# EAGLE board breakout proto (EAGLE 9.0.0)
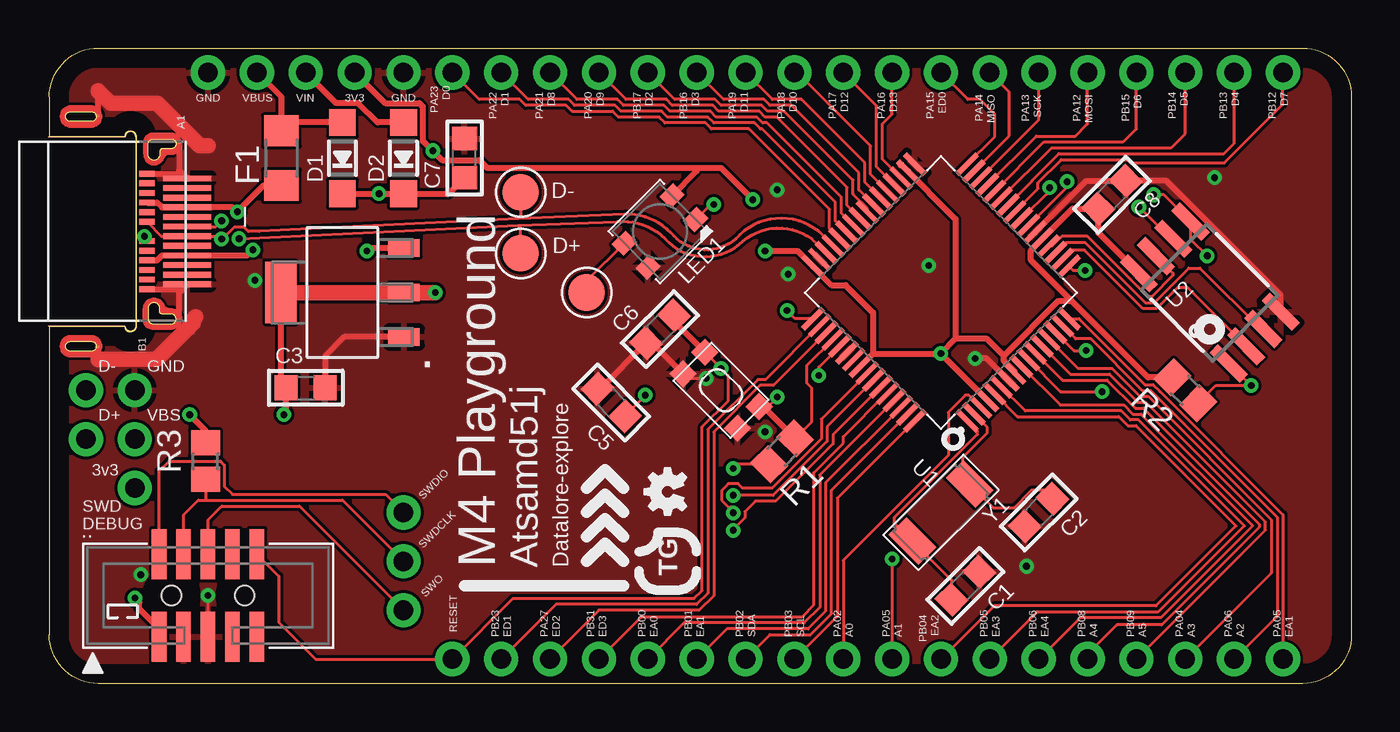
[diagram p0: board, top side]
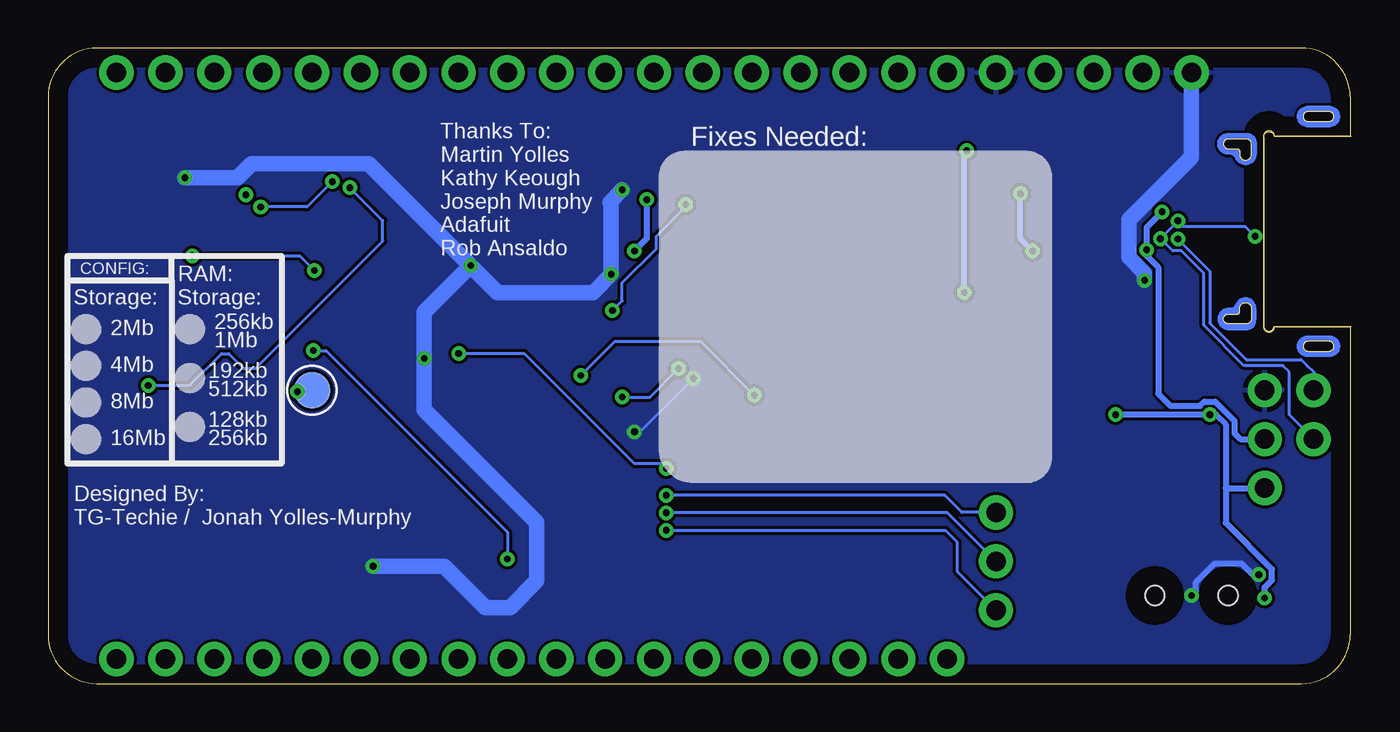
[diagram p1: board, bottom side, seen from below]

Size 67.69 x 33.02 mm. Coordinates in mm from the lower left corner, seen from the top.
Outline: 0,30.48 arc-90 2.54,33.02 65.15,33.02 arc-90 67.69,30.48 67.69,2.54 arc-90 65.15,0 2.54,0 arc-90 0,2.54 0,18.54 3.94,18.54 arc90 4.22,18.26 arc90 4.52,18.54 4.52,28.45 arc90 4.22,28.73 arc90 3.94,28.45 0,28.45 0,30.48
Copper layers (1*16): Top 0.035mm / dielectric 1.5mm / Bottom 0.035mm
Design rules "default": minimum track width 6mil, minimum drill 0.35mm, track to track 6mil, track to pad 6mil, pad to pad 6mil, via to via 6mil, smd to smd 6mil, copper to edge 40mil, drill to drill 6mil, minimum pad ring 10mil, minimum via ring 8mil, stop-mask expansion 4mil, vias tented up to drill 0mil, thermal gap 10mil

## Footprints (pad centres in the part's own frame; a part is rotated, then mirrored left to right if it is on the bottom)
SOT230P700X180-4N = smd 1.626 x 0.889: 1 -3.2,2.311; 2 -3.2,0; 3 -3.2,-2.311 | smd 1.626 x 3.175: 4 3.2,0
2X05_1.27MM_BOX_POSTS = smd 0.76 x 2.6: 1 -2.54,-2.15; 2 -2.54,2.15; 3 -1.27,-2.15; 4 -1.27,2.15; 5 0,-2.15; 6 0,2.15; 7 1.27,-2.15; 8 1.27,2.15; 9 2.54,-2.15; 10 2.54,2.15 | hole 1: -1.905,0; 1.905,0
TE_1-2295018-2_EXTEN = smd 0.3 x 2.5: A1 -2.75,5.53; A2 -2.25,5.53; A3 -1.75,5.53; A4 -1.25,5.53; A5 -0.75,5.53; A6 -0.25,5.53; A7 0.25,5.53; A8 0.75,5.53; A9 1.25,5.53; A10 1.75,5.53; A11 2.25,5.53; A12 2.75,5.53 | smd 0.3 x 0.8: B1 3,3.43; B2 2.5,3.43; B3 2,3.43; B4 1.5,3.43; B5 1,3.43; B6 0.5,3.43; B7 -0.5,3.43; B8 -1,3.43; B9 -1.5,3.43; B10 -2,3.43; B11 -2.5,3.43; B12 -3,3.43 | smd 0.1 x 0.1: S1 -4.6,5.1; S2 4.6,5.1; S3 6,0.9; S4 -6,0.9
MICROBUILDER__0805 = smd 1.2 x 1.3: 1 -1.016,0; 2 1.016,0
SOD-123 = smd 1.4 x 1.4: A 1.85,0; C -1.85,0
R1206 = smd 1.6 x 1.803: 1 -1.422,0; 2 1.422,0
1X2_HEDR = drill 1.016 pad 1.778: 1 -1.27,0; 2 1.27,0
1X4_HEDR = drill 1.016 pad 1.778: 1 -3.81,0; 2 -1.27,0; 3 1.27,0; 4 3.81,0
1X5_HEDR = drill 1.016 pad 1.778: 1 -5.08,0; 2 -2.54,0; 3 0,0; 4 2.54,0; 5 5.08,0
LED3535 = smd 1 x 0.85: 1 -1.75,0.875; 2 -1.75,-0.875; 3 1.75,-0.875; 4 1.75,0.875
R0805 = smd 1.3 x 1.5: 1 -0.95,0; 2 0.95,0
KMR2 = smd 1 x 1: 1 2,0.8; 2 2,-0.8; 3 -2,0.8; 4 -2,-0.8
1X1_POGO = smd 1.905 x 1.905: 1 0,0
QFP50P1200X1200X120-64N = smd 1.47 x 0.28: 1 -5.67,3.75; 2 -5.67,3.25; 3 -5.67,2.75; 4 -5.67,2.25; 5 -5.67,1.75; 6 -5.67,1.25; 7 -5.67,0.75; 8 -5.67,0.25; 9 -5.67,-0.25; 10 -5.67,-0.75; 11 -5.67,-1.25; 12 -5.67,-1.75; 13 -5.67,-2.25; 14 -5.67,-2.75; 15 -5.67,-3.25; 16 -5.67,-3.75; 33 5.67,-3.75; 34 5.67,-3.25; 35 5.67,-2.75; 36 5.67,-2.25; 37 5.67,-1.75; 38 5.67,-1.25; 39 5.67,-0.75; 40 5.67,-0.25; 41 5.67,0.25; 42 5.67,0.75; 43 5.67,1.25; 44 5.67,1.75; 45 5.67,2.25; 46 5.67,2.75; 47 5.67,3.25; 48 5.67,3.75 | smd 0.28 x 1.47: 17 -3.75,-5.67; 18 -3.25,-5.67; 19 -2.75,-5.67; 20 -2.25,-5.67; 21 -1.75,-5.67; 22 -1.25,-5.67; 23 -0.75,-5.67; 24 -0.25,-5.67; 25 0.25,-5.67; 26 0.75,-5.67; 27 1.25,-5.67; 28 1.75,-5.67; 29 2.25,-5.67; 30 2.75,-5.67; 31 3.25,-5.67; 32 3.75,-5.67; 49 3.75,5.67; 50 3.25,5.67; 51 2.75,5.67; 52 2.25,5.67; 53 1.75,5.67; 54 1.25,5.67; 55 0.75,5.67; 56 0.25,5.67; 57 -0.25,5.67; 58 -0.75,5.67; 59 -1.25,5.67; 60 -1.75,5.67; 61 -2.25,5.67; 62 -2.75,5.67; 63 -3.25,5.67; 64 -3.75,5.67
SOIC8_208MIL = smd 0.6 x 2.2: 1 -1.905,-3.315; 2 -0.635,-3.315; 3 0.635,-3.315; 4 1.905,-3.315; 5 1.905,3.315; 6 0.635,3.315; 7 -0.635,3.315; 8 -1.905,3.315
1X1_HEDR = drill 1.016 pad 1.778: 1 0,0
1X3_HEDR = drill 1.016 pad 1.778: 1 -2.54,0; 2 0,0; 3 2.54,0
MICROBUILDER_CRYSTAL_4.9X1.8 = smd 1.3 x 2.2: 1 -2.1,0; 2 2.1,0

## Placement (x,y rotation side)
.  VREG-1.5A-3.3V-ADP3339AKCZ-3.3-RL  [SOT230P700X180-4N]  15.24,20.32 180 top
..  [2X05_1.27MM_BOX_POSTS]  8.26,4.57 0 top
_  USB-C-CON-MIDBRD-SHORT-1-2295018-2EXTEN  [TE_1-2295018-2_EXTEN]  1.65,23.5 270 top
C1  22pf  [MICROBUILDER__0805]  47.62,5.08 225 top
C2  22pf  [MICROBUILDER__0805]  51.44,8.89 225 top
C3  1uf  [MICROBUILDER__0805]  13.34,15.37 0 top
C5  4.7uf  [MICROBUILDER__0805]  29.21,14.61 135 top
C6  .1uf  [MICROBUILDER__0805]  31.75,18.41 45 top
C7  1uf  [MICROBUILDER__0805]  21.59,27.3 90 top
C8  1uf  [MICROBUILDER__0805]  55.24,25.4 225 top
D1  [SOD-123]  15.24,27.3 90 top
D2  [SOD-123]  18.41,27.3 90 top
F1  [R1206]  12.06,27.3 90 top
FRAME1  FRAME-LEDGER  [CREATIVE_COMMONS]  -1.27,-8.89 0 top  (outside the outline)
HEDR1  1X2HEDR  [1X2_HEDR]  37.47,1.27 0 top
HEDR2  1X2HEDR  [1X2_HEDR]  47.62,1.27 0 top
HEDR3  1X4HEDR  [1X4_HEDR]  60.33,31.75 180 top
HEDR4  1X2HEDR  [1X2_HEDR]  32.38,31.75 180 top
HEDR5  1X2HEDR  [1X2_HEDR]  32.38,1.27 0 top
HEDR6  1X5HEDR  [1X5_HEDR]  13.34,31.75 0 top
HEDR7  1X4HEDR  [1X4_HEDR]  40.01,31.75 0 top
HEDR8  1X2HEDR  [1X2_HEDR]  18.41,7.62 270 top
HEDR9  1X4HEDR  [1X4_HEDR]  24.77,31.75 0 top
HEDR10  1X2HEDR  [1X2_HEDR]  4.45,13.97 90 top
HEDR11  1X2HEDR  [1X2_HEDR]  1.91,13.97 270 top
LED1  LED-NEO-WS2812B3535  [LED3535]  31.75,23.5 225 top
LOGO1  OSHW-LOGOMINI  [OSHW-LOGO-MINI]  32.13,9.97 90 top
R1  10k  [R0805]  38.1,12.06 225 top
R2  10k  [R0805]  59.05,15.24 135 top
R3  10k  [R0805]  8.13,11.56 90 top
SW1  SPST_TACT-KMR2  [KMR2]  34.92,15.24 315 top
TP1  TESTPOINT_1X1  [1X1_POGO]  27.94,20.32 0 top
U1  MCU-ATSAMD51J  [QFP50P1200X1200X120-64N]  46.35,20.32 135 top
U2  [SOIC8_208MIL]  60.33,20.32 45 top
U$1  1X1HEDR  [1X1_HEDR]  41.27,1.27 90 top
U$2  1X3HEDR  [1X3_HEDR]  53.98,1.27 0 top
U$3  1X1HEDR  [1X1_HEDR]  28.57,1.27 90 top
U$4  1X3HEDR  [1X3_HEDR]  51.44,31.75 0 top
U$5  1X1HEDR  [1X1_HEDR]  46.35,31.75 90 top
U$6  1X1HEDR  [1X1_HEDR]  26.04,1.27 90 top
U$7  1X1HEDR  [1X1_HEDR]  23.5,1.27 90 top
U$8  1X1POGO  [1X1_POGO]  53.98,15.24 270 bottom
U$9  1X1HEDR  [1X1_HEDR]  20.95,1.27 90 top
U$10  1X3HEDR  [1X3_HEDR]  61.59,1.27 180 top
U$11  1X1HEDR  [1X1_HEDR]  43.81,1.27 90 top
U$12  1X1HEDR  [1X1_HEDR]  18.41,3.81 0 top
U$13  1X1POGO  [1X1_POGO]  24.51,25.53 0 top
U$14  1X1POGO  [1X1_POGO]  24.51,22.35 0 top
U$15  [LOGO_TG_TEST_LARGE]  33.66,6.35 90 top
U$16  1X1HEDR  [1X1_HEDR]  4.45,10.16 0 top
Y1  32.768  [MICROBUILDER_CRYSTAL_4.9X1.8]  46.35,8.89 225 top

## Library data of the parts
. = 0TG-Lib v01.3; AVAILABILITY: Good; DESCRIPTION: IC REG LINEAR 3.3V 1.5A SOT223-3; MF: Analog Devices; MP: ADP3339AKCZ-3.3-RL; PACKAGE: SOT-223-3 Analog Devices; PRICE: 3.52 USD
.. _ C1-C3 C5-C8 D1 D2 HEDR1-HEDR11 LED1 TP1 U2 U$1-U$16 Y1 = 0TG-Lib v01.3
F1 SW1 = 00adafruit
FRAME1 LOGO1 = SparkFun-Aesthetics
R1-R3 = 0TG-Lib v01.3; SPICEPREFIX: R
U1 = 0TG-Lib v01.3; AVAILABILITY: Good; DESCRIPTION: 120MHZ 1024KB Flash 64 TQFP PKG inTray 85CTemp, 64 TQFP 10x10x1mm TRAY; MF: Microchip; MP: ATSAMD51J20A-AU; PACKAGE: TQFP-64 Microchip; PRICE: 4.66 USD

## Nets
3V3: ..2 ..4 ...1 C3.1 C8.2 HEDR6.4 LED1.2 R1.2 R2.2 R3.2 U1.4 U1.8 U1.21 U1.34 U1.48 U1.56 U2.8 U$16.1
A0: U1.3 U$1.1
A1: U1.14 U$11.1
A2: U1.15 U$10.2
A3: U1.13 U$10.3
A4: U1.11 U$2.2
A5: U1.12 U$2.3
D0: HEDR9.1 U1.44
D1: HEDR9.2 U1.43
D2: HEDR4.2 U1.40
D3: HEDR4.1 U1.39
D4: HEDR3.2 U1.26
D5: HEDR3.3 U1.27
D6: HEDR3.4 U1.28
D7: HEDR3.1 U1.25
D8: HEDR9.3 U1.42
D9: HEDR9.4 U1.41
D10: HEDR7.2 U1.37
D11: HEDR7.1 U1.38
D12: HEDR7.3 U1.36
D13: HEDR7.4 U1.35
D+: _.A6 _.B6 HEDR11.2 U1.46 U$14.1
D-: _.A7 _.B7 HEDR11.1 U1.45 U$13.1
EA0: HEDR5.1 U1.61
EA1: HEDR5.2 U1.62
EA2: HEDR2.1 U1.5
EA3: HEDR2.2 U1.6
EA4: U1.9 U$2.1
EA5: U1.16 U$10.1
ED0: U1.32 U$5.1
ED1: U1.50 U$7.1
ED2: U1.51 U$6.1
ED3: U1.60 U$3.1
FLASH_CS: R2.1 U1.24 U2.1
FLASH_IO0: U1.17 U2.5
FLASH_IO1: U1.18 U2.2
FLASH_IO2: U1.19 U2.3
FLASH_IO3: U1.20 U2.7
FLASH_SCK: U1.23 U2.6
GND: ..1 ...3 ...5 _.A1 _.A12 _.B1 _.B12 _.S1 _.S2 _.S3 _.S4 C1.1 C2.2 C3.2 C5.2 C6.1 C7.2 C8.1 HEDR6.1 HEDR6.5 HEDR10.2 LED1.4 SW1.2 SW1.4 U1.7 U1.22 U1.33 U1.47 U1.54 U2.4
MISO: U1.31 U$4.1
MOSI: U1.29 U$4.3
N$4: C5.1 U1.53
N$32: C1.2 U1.1 Y1.2
N$33: C2.1 U1.2 Y1.1
NEOPIX: LED1.1 U1.49
NEOPIX_DOUT: LED1.3 TP1.1
RESET: ...10 C6.2 R1.1 SW1.1 SW1.3 U1.52 U$9.1
SCK: U1.30 U$4.2
SCL: HEDR1.2 U1.64
SDA: HEDR1.1 U1.63
SWDCLK: ...4 HEDR8.2 R3.1 U1.57
SWDIO: ...2 HEDR8.1 U1.58
SWO: ...6 U1.59 U$12.1
USB_HOSTEN: U1.10 U$8.1
VBUS: D1.A F1.2 HEDR6.2
VBUS_RAW: _.A4 _.A9 _.B4 _.B9 F1.1 HEDR10.1
VIN: D2.A HEDR6.3
VSORS: ..3 C7.1 D1.C D2.C
VSW: U1.55

## Tracks (layer width: path | path; a pad name or v marks a point on that pad's centre or on a via)
3V3  (via drill 0.35)
  Top 0.152: R1.2 35.78,11.39 v35.56,11.18 | 52.47,19.89 53.02,20
  Top 0.305: U2.8 54.53,23.42 C8.2 53.19,24.68 U1.21 51.03,22.52 51.03,21.99 53.02,20 57.11,15.91 R2.2 | U1.8 50.19,16.21 49.62,16.78 49.62,17.03 | 49.62,17.03 52.47,19.89 53.14,19.89 54.04,18.99 | U1.56 42.83,17.14 | v46.35,17.14 U1.4 | 42.83,17.14 v46.35,17.14 | U1.34 44.31,26.96 44.23,26.96 44.27,26.92 44.32,26.92 47.11,24.14 47.11,17.91 | 42.83,17.14 42.83,19.28 41.4,20.7 40.67,20.7 U1.48 38.89,22.48 v37.21,22.48 | 49.62,17.03 48.74,17.91 47.11,17.91 | 47.11,17.91 v46.35,17.14 | HEDR6.4 17.46,30.16 19.24,30.16 19.42,29.98 19.42,28.2 v19.94,27.69 20.43,27.19 22.37,27.19 22.76,26.8 33.66,26.8 | v36.58,25.15 34.92,26.8 33.66,26.8 | LED1.2 33.66,26.64 33.66,26.8 | ..4 12.04,15.65 C3.1 12.32,14.1 v12.19,13.97 | v4.46,4.45 4.68,4.22 4.68,3.88 5.71,2.85 ...1 | 7.93,12.7 R3.2 8.13,13.14 v7.3,13.97
  Top 0.813: ..4 ..2 v20.07,20.32
  Bottom 0.152: v35.56,11.18 35.81,11.43 37.21,11.43 42.93,17.14 v46.35,17.14
  Bottom 0.305: v36.58,25.15 36.58,23.11 v37.21,22.48 | v20.07,20.32 20.07,27.56 v19.94,27.69 | v4.46,4.45 4.46,4.99 4.07,5.37 4.07,5.94 6.48,8.34 6.48,10.16 | v12.19,13.97 v7.3,13.97 6.99,13.97 6.48,13.46 6.48,10.16 | 6.48,10.16 U$16.1
A0
  Top 0.152: U1.3 47.8,14.99 47.62,14.99 46.74,14.1 46.74,11.86 41.27,6.4 U$1.1
A1  (via drill 0.35)
  Top 0.152: U1.14 53.26,17.3 v53.9,17.3 | v43.81,6.48 U$11.1
  Bottom 0.152: v53.9,17.3 53.24,17.3 44.96,9.02 43.81,7.87 v43.81,6.48
A2
  Top 0.152: U1.15 53.36,17.91 54.15,17.91 56.83,15.23 57.25,15.23 63.83,8.65 63.83,3.5 U$10.2
A3
  Top 0.152: U1.13 53.47,16.38 55.24,16.38 56.7,14.92 57.13,14.92 63.52,8.52 63.52,5.74 U$10.3
A4
  Top 0.152: U1.11 52.67,15.77 54.99,15.77 56.45,14.31 56.88,14.31 56.93,14.26 62.92,8.27 62.92,8.13 57.84,3.05 55.5,3.05 53.98,1.52 U$2.2
A5
  Top 0.152: U1.12 53.07,16.08 55.12,16.08 56.58,14.62 57,14.62 63.22,8.4 63.22,7.98 U$2.3
D0
  Top 0.152: U1.44 40.56,23.64 40.56,24.64 36.37,28.83 34.42,28.83 34.12,29.13 32.01,29.13 31.7,29.44 29.59,29.44 29.29,29.74 27.18,29.74 26.88,30.05 24.77,30.05 24.46,30.35 22.35,30.35 HEDR9.1
D1
  Top 0.152: U1.43 40.87,24.04 40.87,25.02 37.06,28.83 36.96,28.83 36.66,29.13 34.55,29.13 34.24,29.44 32.13,29.44 31.83,29.74 29.72,29.74 29.41,30.05 27.31,30.05 27,30.35 24.89,30.35 HEDR9.2
D2
  Top 0.152: U1.40 42.52,24.69 41.78,25.43 41.78,26.16 38.2,29.74 37.34,29.74 37.03,30.05 34.93,30.05 34.62,30.35 32.51,30.35 HEDR4.2
D3
  Top 0.152: U1.39 42.09,25.65 42.09,26.54 38.58,30.05 37.47,30.05 37.16,30.35 35.05,30.35 HEDR4.1
D4
  Top 0.152: U1.26 51.09,26.12 51.09,26.15 52.48,27.54 61.06,27.54 61.59,28.07 HEDR3.2
D5
  Top 0.152: U1.27 52.11,27.84 58.32,27.84 59.05,28.57 HEDR3.3
D6
  Top 0.152: U1.28 51.7,28.14 55.83,28.14 56.52,28.83 HEDR3.4
D7
  Top 0.152: U1.25 51.4,25.72 51.4,26.02 52.61,27.23 56.02,27.23 56.2,27.05 61.09,27.05 64.14,30.1 HEDR3.1
D8
  Top 0.152: U1.42 41.17,24.44 41.17,25.27 37.31,29.13 37.09,29.13 36.78,29.44 34.67,29.44 34.37,29.74 32.26,29.74 31.95,30.05 29.85,30.05 29.54,30.35 27.43,30.35 HEDR9.3
D9
  Top 0.152: U1.41 41.48,24.84 41.48,25.78 37.82,29.44 37.21,29.44 36.91,29.74 34.8,29.74 34.49,30.05 32.39,30.05 32.08,30.35 29.97,30.35 HEDR9.4
D10
  Top 0.152: U1.37 42.7,26.45 42.7,27.94 38.89,31.75 HEDR7.2
D11
  Top 0.152: U1.38 42.39,26.05 42.39,27.05 39.09,30.35 37.59,30.35 HEDR7.1
D12
  Top 0.152: U1.36 43,26.86 43,30.02 HEDR7.3
D13
  Top 0.152: U1.35 43.31,27.26 43.31,29.08 43.81,29.59 HEDR7.4
D+  (via drill 0.35)
  Top 0.152: v9.87,23.11 24.38,23.8 | 24.38,23.8 29.53,24 arc-55 32.19,22.92 arc86 36.07,22.99 arc-77 39.62,23.11 U1.46 | _.A6 8.66,23.75 v8.96,24.04 | _.B6 4.95,23.12 v4.95,23.24 | U$14.1 24.51,23.67 24.38,23.8
  Bottom 0.152: v4.95,23.24 5.46,23.75 8.69,23.75 8.96,24.02 | v8.96,24.04 8.96,24.02 | 8.96,24.02 v9.87,23.11 9.84,23.11 9.21,22.49 8.79,22.49 7.62,21.32 7.62,20 7.61,19.99 7.61,18.61 5.52,16.52 3.5,16.52 3.17,16.19 3.17,13.97 HEDR11.2
D-  (via drill 0.35)
  Top 0.152: _.B7 5.83,23.25 _.A7 8.81,23.25 | 8.81,23.25 v8.96,23.09 | U1.45 40.01,23.5 arc87 35.69,23.11 arc-94 32.32,23.43 arc48 29.91,24.38 24.39,24.16 | 24.39,24.16 10.92,23.5 10.35,23.5 10.12,23.72 9.62,23.72 9.14,23.25 8.81,23.25 | U$13.1 24.51,24.28 24.39,24.16
  Bottom 0.152: v8.96,23.09 7.3,21.43 7.3,18.73 5.4,16.83 2.57,16.83 2.56,16.82 2.54,16.82 2.24,16.51 2.22,16.51 1.91,16.19 HEDR11.1
EA0
  Top 0.152: U1.61 40.06,10.84 40.06,3.96 39.24,3.15 32.99,3.15 HEDR5.1
EA1
  Top 0.152: U1.62 40.36,10.44 40.36,6.86 40.36,3.76 39.45,2.85 35.23,2.85 HEDR5.2
EA2
  Top 0.152: U1.5 50.33,13.87 55.6,13.87 56.07,13.4 56.5,13.4 61.69,8.2 57.53,4.04 49.12,4.04 HEDR2.1
EA3
  Top 0.152: HEDR2.2 51.36,3.73 57.66,3.73 62.12,8.2 56.62,13.7 56.2,13.7 55.73,14.17 50.73,14.17 U1.6
EA4
  Top 0.152: U1.9 52.55,14.48 55.85,14.48 56.32,14.01 56.75,14.01 62.56,8.2 57.79,3.43 53.59,3.43 U$2.1
EA5
  Top 0.152: U1.16 53.52,18.96 56.95,15.53 57.38,15.53 57.73,15.18 64.14,8.78 U$10.1
ED0
  Top 0.152: U1.32 49.15,28.42 49.15,29.59 48.39,30.35 47.75,30.35 U$5.1
ED1
  Top 0.152: U1.50 37.24,15.8 37.08,15.8 36.83,15.8 34.24,13.21 34.24,4.7 33.66,4.12 26.34,4.12 U$7.1
ED2
  Top 0.152: U1.51 37.64,15.49 36.96,15.49 34.54,13.08 34.54,4.57 33.78,3.81 28.57,3.81 U$6.1
ED3
  Top 0.152: U$3.1 30.76,3.45 39.12,3.45 39.75,4.09 39.75,10.96 41.27,12.49 41.27,12.83 43.52,15.07 U1.60
FLASH_CS  (via drill 0.35)
  Top 0.152: U2.1 62.46,15.49 v62.48,15.49 60.65,15.49 R2.1 | v52.01,25.77 52.01,25.62 U1.24
  Bottom 0.152: v62.48,15.49 60.33,15.49 58.67,17.14 58.29,17.14 57.53,16.38 56.9,16.38 50.29,22.99 50.29,24.05 v52.01,25.77
FLASH_IO0  (via drill 0.35)
  Top 0.152: v57.4,25.4 57.94,25.4 U2.5 59.33,23.09 v60.2,22.23 | v53.85,21.46 53.23,21.46 U1.17
  Bottom 0.152: v60.2,22.23 54.61,22.23 v53.85,21.46
FLASH_IO1
  Top 0.152: U2.2 59.44,20.31 59.44,20.32 59.18,20.57 58.65,20.57 57.56,19.49 56.85,19.49 53.82,22.52 53.16,22.52 U1.18
FLASH_IO2
  Top 0.152: U1.19 52.85,22.93 53.84,22.93 56.98,19.79 57.44,19.79 59.23,21.59 59.82,21.59 62.98,18.43 U2.3
FLASH_IO3
  Top 0.152: U1.20 52.14,22.74 52.63,23.23 53.97,23.23 57.1,20.1 57.31,20.1 58.42,21.21 58.42,21.33 U2.7
FLASH_SCK  (via drill 0.35)
  Top 0.152: U1.23 52.91,25.82 v52.91,26.08 | v56.64,24.77 58.29,23.11 U2.6
  Bottom 0.152: v52.91,26.08 54.23,24.77 v56.64,24.77
GND  (via drill 0.35)
  Top 0.152: ...5 v8.26,4.57 | SW1.4 33.17,15.86 v34.15,15.86
  Top 0.305: U2.4 64.02,20.18 58.08,26.12 C8.1 53.92,26.12 U1.22 | C5.2 28.66,15.32 C6.1 31.34,17.7 SW1.4 | _.B12 6.93,26.5 _.A1 6.75,26.68 _.S1 | _.B1 6.93,20.5 | 6.93,20.5 _.A12 | _.S2 6.75,20.32 6.93,20.5 | U1.7 48.72,16.89 v48.13,16.89 | ..1 15.34,18.01 14.35,17.02 C3.2 | _.S3 2.54,17.48 2.54,16.83 | _.S4 2.55,30.79
  Top 0.813: 2.54,16.83 2.55,16.84 5.58,16.84 7.15,18.41 7.18,18.41 7.31,18.57 7.47,18.73 7.47,18.91 7.62,19.05 | 2.54,30.8 2.55,30.79 3.19,30.15 5.61,30.15 7.82,27.94 8.26,27.94
  Bottom 0.152: v34.15,15.86 36.93,13.08 v37.21,13.08
  Bottom 0.305: v8.26,4.57 8.02,4.81 8.02,5.26 7.04,6.24 5.66,6.24 5.08,5.66 v4.76,5.66
  Bottom 0.813: v45.72,21.72 48.13,19.3 v48.13,16.89 48.13,14.22 42.29,8.38 42.29,5.33 43.69,3.94 44.96,3.94 47.12,6.1 v50.8,6.1 | v60.58,26.29 57.84,26.29 57.11,27.02 51.02,27.02 v45.72,21.72 | v45.72,21.72 44.32,20.32 39.37,20.32 v38.42,21.27 38.42,24.96 38.48,25.02 v37.85,25.65 | v10.7,20.95 10.7,21.33 11.52,22.15 11.52,24.1 8.26,27.36 HEDR6.1
  pour Top: -1.14,33.91 70.74,33.91 70.74,-1.14 -2.54,-1.14 -2.54,33.66 -2.41,33.78
  pour Bottom: 69.22,34.61 -2.86,34.61 -2.86,-1.27 69.22,-1.27
MISO
  Top 0.152: U1.31 49.91,28.47 49.91,30.73 U$4.1
MOSI
  Top 0.152: U1.29 51.3,28.45 53.34,28.45 53.98,29.08 U$4.3
N$4  (via drill 0.35)
  Top 0.152: U1.53 40.01,16.45 v40.01,16 | v30.99,14.99 29.93,13.93 C5.1
  Bottom 0.152: v40.01,16 38.23,17.78 33.78,17.78 v30.99,14.99
N$32
  Top 0.152: U1.1 48.26,13.11 48.26,12.95 43.94,8.64 43.94,8.33 Y1.2 46.91,5.37 C1.2
N$33
  Top 0.152: U1.2 48.77,13.31 48.77,13.03 47.5,11.76 47.5,10.72 Y1.1 49.07,9.14 50.16,9.14 51.05,10.03 51.73,10.03 C2.1
NEOPIX  (via drill 0.35)
  Top 0.152: U1.49 38.77,18.96 v38.35,19.38 | v34.54,24.89 34.38,24.89 LED1.1
  Bottom 0.152: v38.35,19.38 37.85,19.89 37.85,20.83 36.07,22.61 36.07,23.24 34.54,24.77 v34.54,24.89
NEOPIX_DOUT
  Top 0.152: LED1.3 27.94,20.92 TP1.1
RESET  (via drill 0.35)
  Top 0.152: U1.52 39.37,16.52 39.37,15.62 39.62,15.37 39.62,13.59 R1.1 | SW1.3 v34.92,16.38 35.29,16 35.31,16 35.31,14.71 33.93,13.33 33.93,4.83 33.53,4.42 24.11,4.42 U$9.1 13.84,1.27 11.94,3.17 11.94,5.58 ...10 | SW1.1 37.35,14.39 v37.85,14.89
  Top 0.305: C6.2 32.47,18.83 SW1.3 | SW1.1 37.12,14.39 R1.1
  Bottom 0.152: v37.85,14.89 36.41,14.89 v34.92,16.38
SCK
  Top 0.152: U1.30 51.44,29.29 U$4.2
SCL
  Top 0.152: U1.64 40.97,9.63 40.97,3.5 HEDR1.2
SDA
  Top 0.152: HEDR1.1 37.47,2.54 39.57,2.54 40.66,3.63 40.66,10.03 U1.63
SWDCLK  (via drill 0.35)
  Top 0.152: ...4 6.99,8.76 7.75,9.53 8.13,9.53 | R3.1 8.13,9.53 | 8.13,9.53 15.24,9.53 HEDR8.2 | U1.57 40.13,13.74 40.13,12.71 37.58,10.16 36.04,10.16 35.81,10.39 35.31,10.39 34.95,10.03 34.95,9.53 35.31,9.17 35.41,9.17 35.56,9.02 v35.56,8.87
  Bottom 0.152: HEDR8.2 20.93,8.87 v35.56,8.87
SWDIO  (via drill 0.35)
  Top 0.152: ...2 5.71,11.05 6.22,11.56 8.89,11.56 8.96,11.49 8.97,11.49 9.11,11.35 9.11,10.25 9.53,9.83 17.48,9.83 HEDR8.1 | U1.58 40.44,13.34 40.44,12.59 37.63,9.78 v35.56,9.78
  Bottom 0.152: HEDR8.1 20.19,8.89 21.08,9.78 v35.56,9.78
SWO  (via drill 0.35)
  Top 0.152: ...6 8.26,8.51 8.97,9.22 13.01,9.22 U$12.1 | U1.59 40.74,12.94 40.74,12.46 37.76,9.47 36.7,9.47 36.17,8.94 36.17,8.62 35.56,8.01 v35.56,7.96
  Bottom 0.152: v35.56,7.96 21.04,7.96 20.45,7.37 20.45,5.84 U$12.1
USB_HOSTEN  (via drill 0.35)
  Top 0.152: U1.10 52.57,15.17 v54.74,15.17
  Bottom 0.152: v54.74,15.17 54.66,15.24 U$8.1
VBUS
  Top 0.305: HEDR6.2 12.06,30.48 12.06,28.83 | 12.06,28.83 F1.2 | D1.A 12.39,29.16 12.06,28.83
VBUS_RAW  (via drill 0.35)
  Top 0.305: _.B9 5.61,25 5.86,24.75 _.A4 9.54,24.75 v9.78,24.51 11.15,25.88 F1.1 | _.B4 5.61,22 5.86,22.25 _.A9 10.29,22.25 v10.58,22.54
  Bottom 0.305: v9.78,24.51 10.58,23.71 v10.58,22.54 10.58,22.22 9.98,21.62 9.98,15.06 9.35,14.43 7.81,14.43 7.58,14.65 7.02,14.65 6.62,14.25 6.02,13.65 6.02,13.01 5.71,12.7 HEDR10.1
VIN
  Top 0.305: HEDR6.3 14.93,30.16 16.07,30.16 17.07,29.16 D2.A
VSORS  (via drill 0.35)
  Top 0.305: C7.1 20.76,25.45 D2.C v17.14,25.45 D1.C | ..3 16.66,22.63 v16.51,22.48
  Bottom 0.305: v16.51,22.48 17.14,23.11 v17.14,25.45

## Text on the board
tPlace: PA23 / D0 | PA22 / D1 | PA21 / D8 | PA20 / D9 | PB17 / D2 | PB16 / D3 | PA19 / D11 | PA18 / D10 | PA17 / D12 | PA16 / D13 | PA15 / ED0 | PA14 / MISO | PA13 / SCK | PA12 / MOSI | PB15 / D6 | PB14 / D5 | PB13 / D4 | PB12 / D7 | GND | VBUS | VIN | 3V3 | GND | D- | D+ | D- | GND | D+ | VBS | 3v3 | SWDIO | SWD / DEBUG | SWDCLK | M4 Playground | Atsamd51j | Datalore-explore | SWO | RESET | PB23 / ED1 | PA27 / ED2 | PB31 / ED3 | PB00 / EA0 | PB01 / EA1 | PB02 / SDA | PB03 / SCL | PA02 / A0 | PA05 / A1 | PB04 / EA2 | PB05 / EA3 | PB06 / EA4 | PB08 / A4 | PB09 / A5 | PA04 / A3 | PA06 / A2 | PA05 / EA1
bPlace: Fixes Needed: | Thanks To: / Martin Yolles / Kathy Keough / Joseph Murphy / Adafuit / Rob Ansaldo | CONFIG: | RAM: / Storage: | Storage: | 256kb | 2Mb | 1Mb | 192kb | 4Mb | 512kb | 8Mb | 128kb | 256kb | 16Mb | Designed By: / TG-Techie / Jonah Yolles-Murphy